# Altium PCB Solar Panel.PcbDoc
Units mm, origin at the board's own origin, x right, y up, seen from the top; angles counter-clockwise.
Board outline 284.5 x 311.5 mm, 2 copper layers (Top Layer, Bottom Layer); 9 components, 6 nets, 24 pads, 0 vias.
Unrouted connection lines stored in the file: 10.
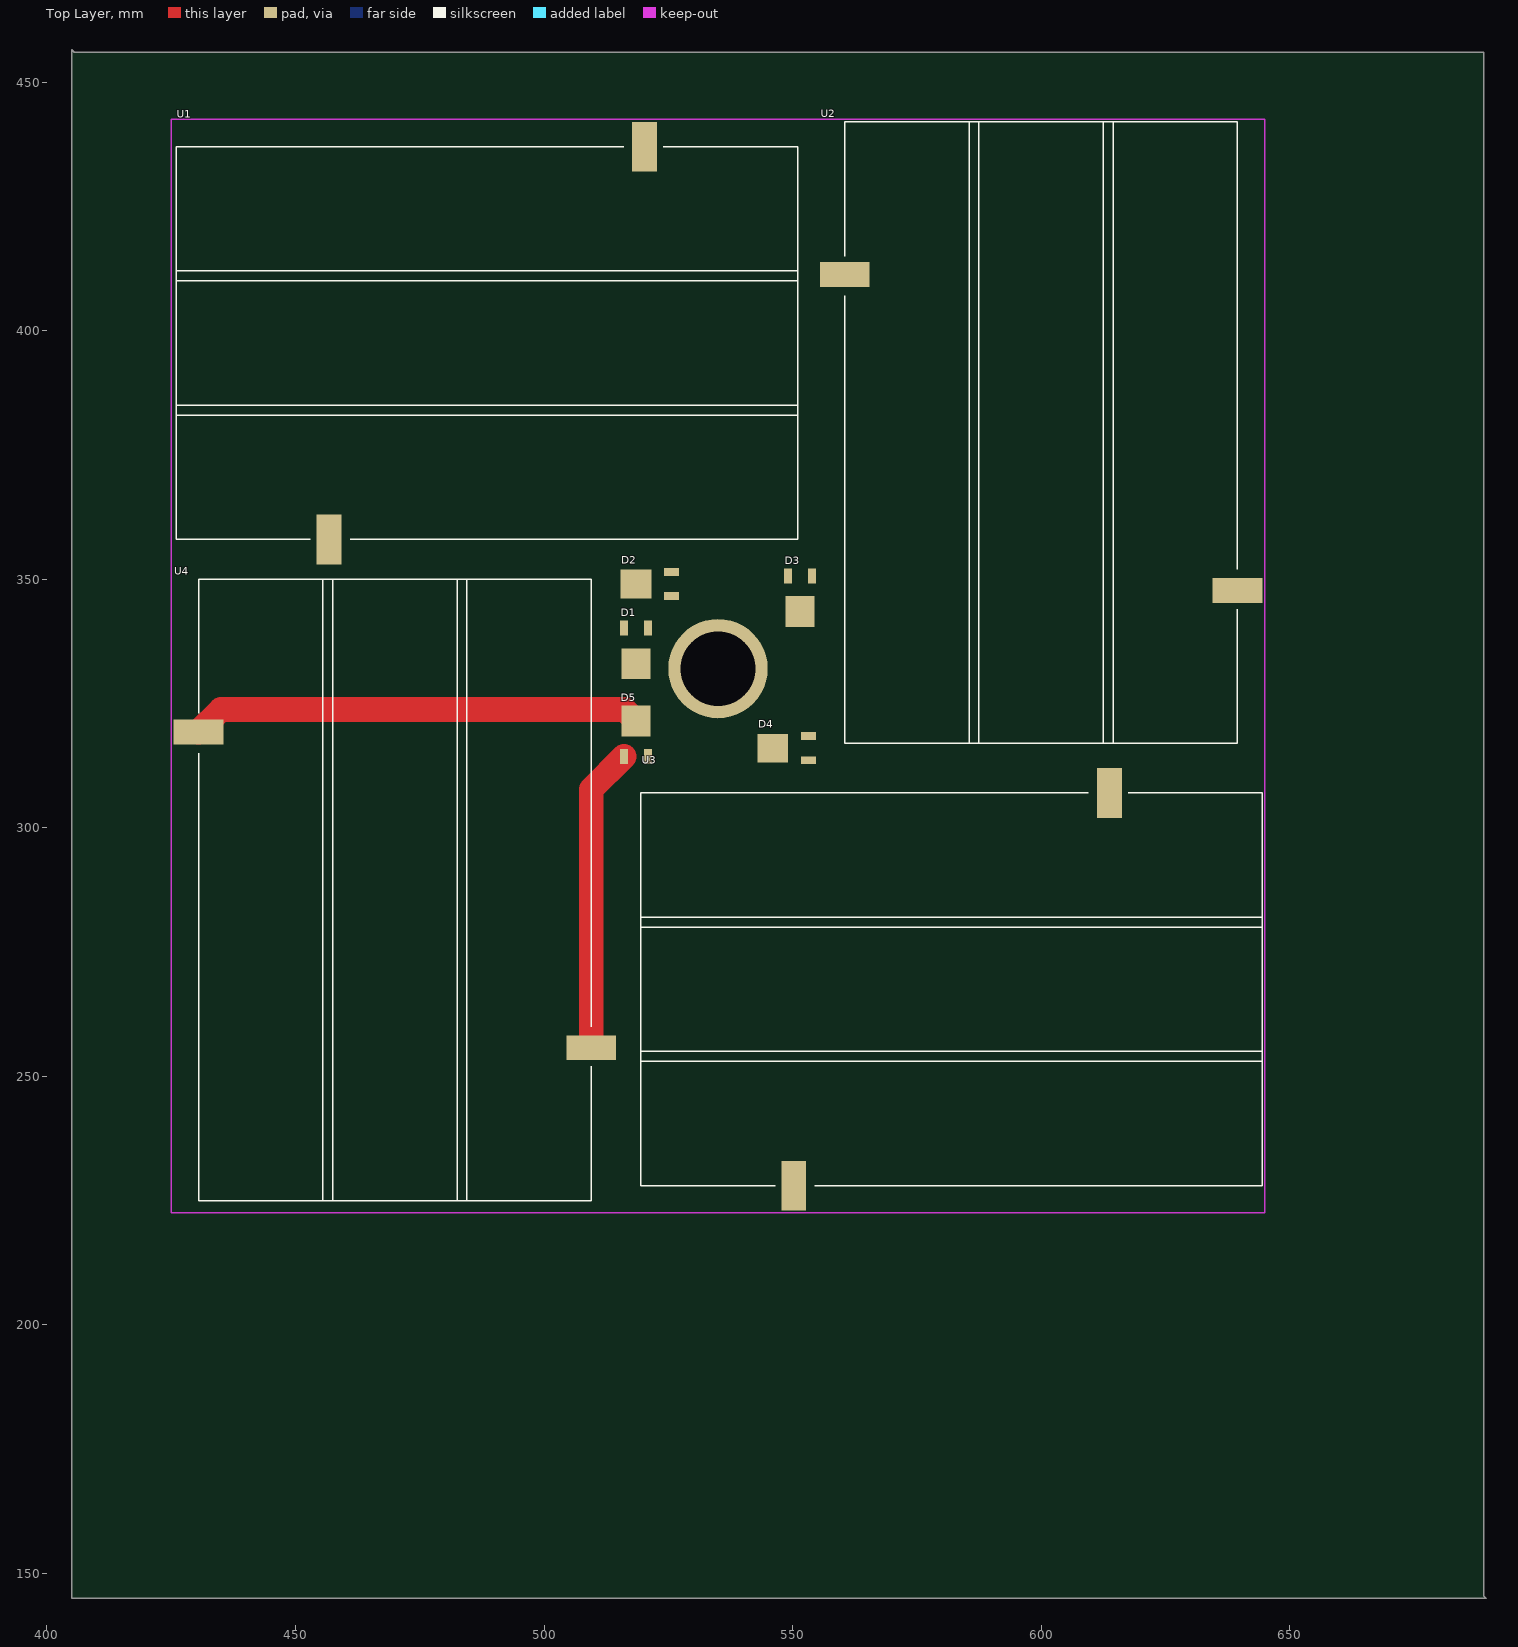
[diagram p0: Top Layer view]
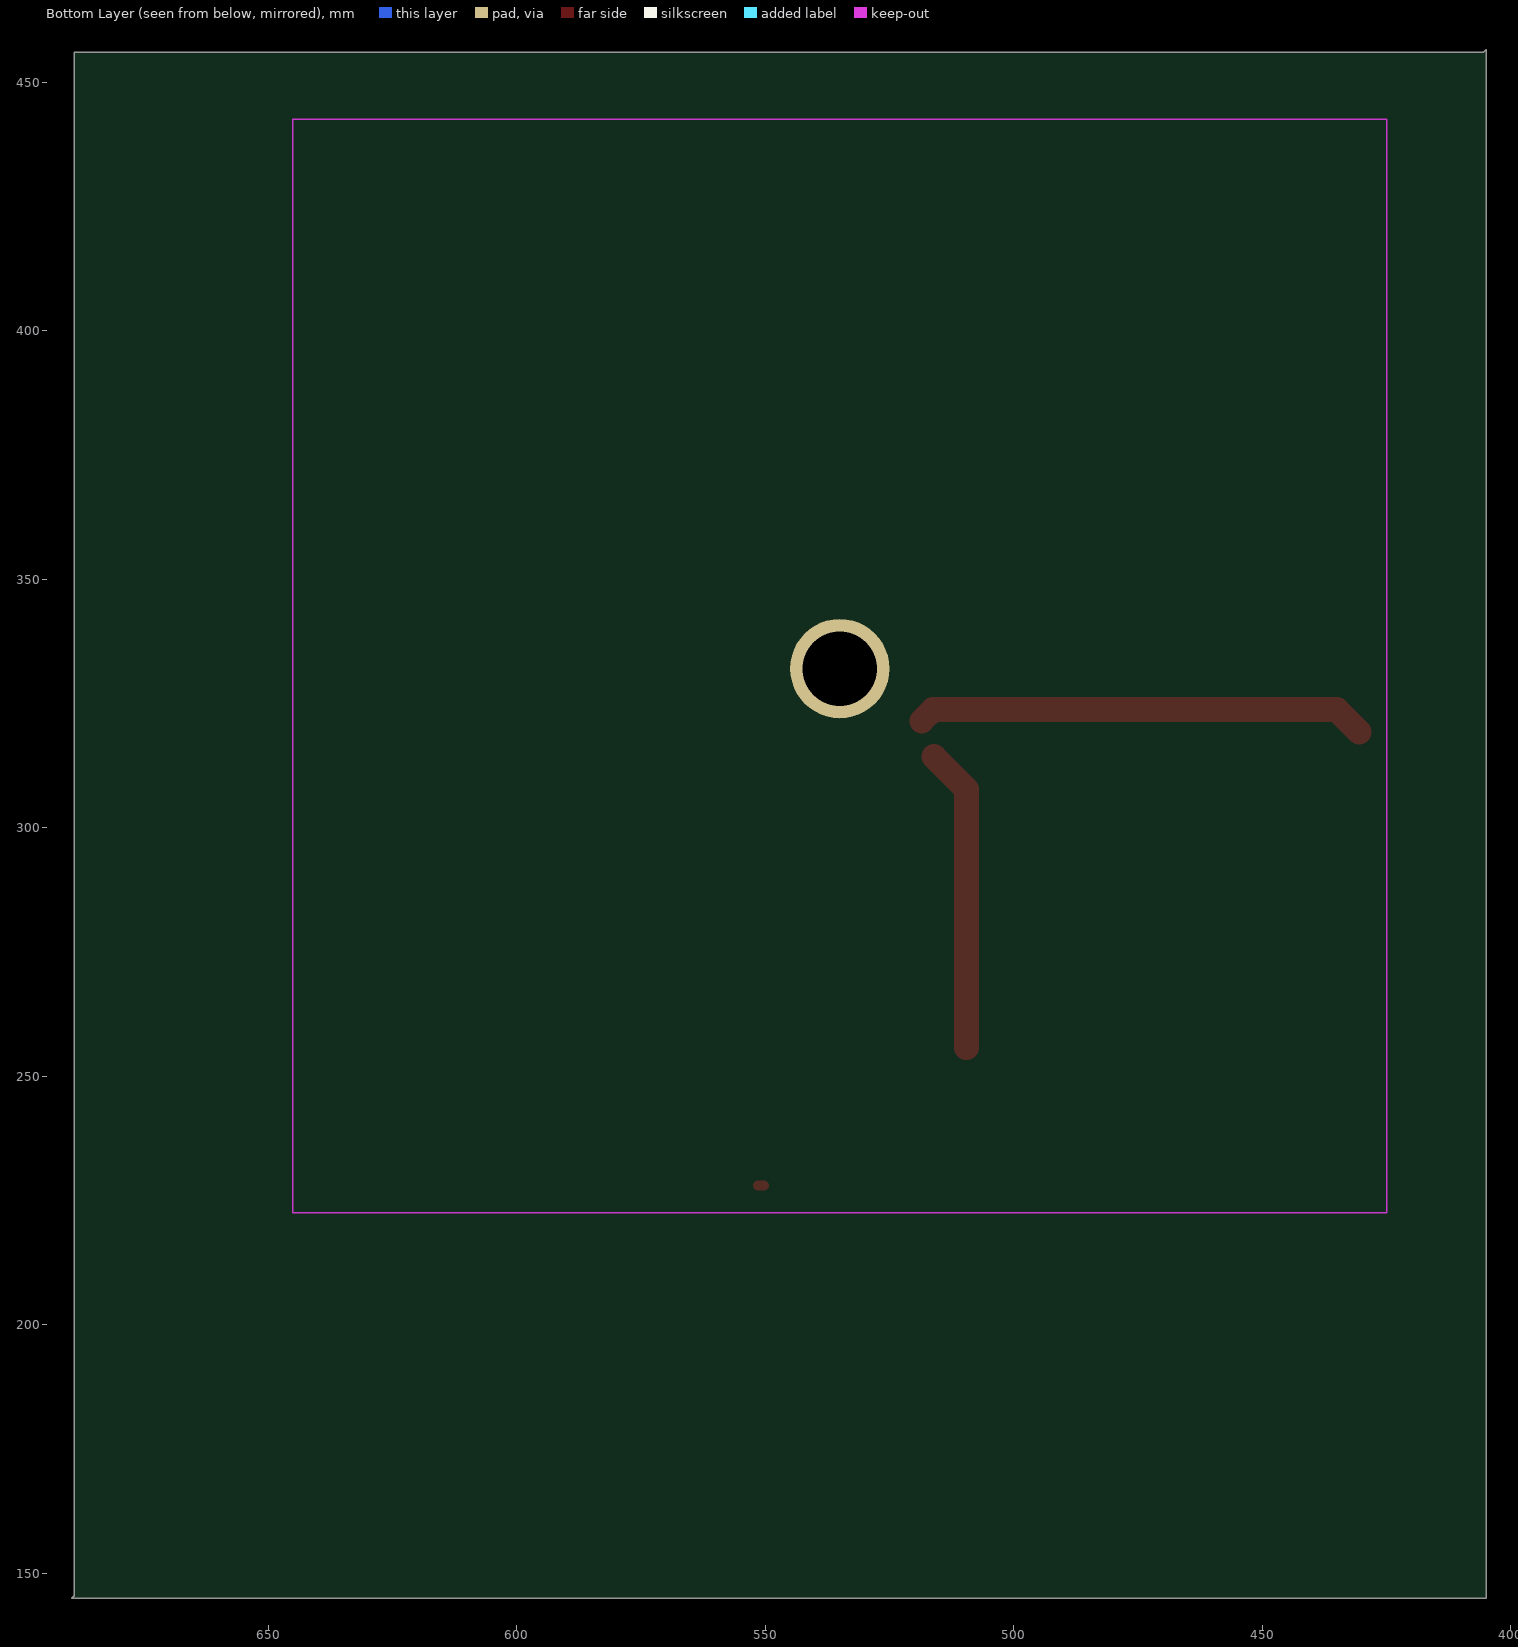
[diagram p1: Bottom Layer view, seen from below]

## Layer stack, top to bottom
Top Layer: signal copper 0.0356
Dielectric: dielectric 0.32, FR-4, Dk 4.8
Bottom Layer: signal copper 0.0356

## Board outline
407.5,456 689,456 689,145.5 689.5,145 405,145 405,456.5 405.5,456 670.5,456

## Design rules (kind name [scope] priority, off if disabled: settings)
Clearance [All] p1: gap=0.254
PolygonConnect [All] p1: connectstyle=Relief reliefconductorwidth=0.254 reliefentries=4 polygonreliefangle="90 Angle"
RoutingVias [All] p1: holewidth=0.711 width=1.27 viastyle="Through Hole" minholewidth=0.711 minwidth=1.27 maxholewidth=0.711 maxwidth=1.27
SilkscreenOverComponentPads [All] p1: minsilkscreentomaskgap=0.254
SolderMaskExpansion [All] p1: expansion=0.102
Width [All] p1: maxlimit=500 minlimit=2 preferedwidth=5
27 further rules are at their usual default settings.

## Components (designator, comment, footprint, x,y, rotation, side; value= is the part's Value field where it differs from the comment)
D1 "D Schottky" "DIODE, SCHOTTKY, DPAK" 518.5,333 r90 top
D2 "D Schottky" "DIODE, SCHOTTKY, DPAK" 518.5,349 r0 top
D3 "D Schottky" "DIODE, SCHOTTKY, DPAK" 551.5,343.5 r90 top
D4 "D Schottky" "DIODE, SCHOTTKY, DPAK" 546,316 r0 top
D5 "D Schottky" "DIODE, SCHOTTKY, DPAK" 518.5,321.5 r270 top
U1 "Solar cell strip" SOLARCELLSTRIP 426,358 r0 top
U2 "Solar cell strip" SOLARCELLSTRIP 560.5,442 r270 top
U3 "Solar cell strip" SOLARCELLSTRIP 519.5,228 r0 top
U4 "Solar cell strip" SOLARCELLSTRIP 509.5,225 r90 top

## Footprints (in the part's own frame and the unit in brackets; to place one, negate y for a bottom-side part, rotate by r counter-clockwise, add the part's x,y. Pads: shape width x height; smd on the part's side, far side on the other; paste and mask are expansions set on the pad)
"DIODE, SCHOTTKY, DPAK" [mm]
  rect 3x1.6 smd: 1(7.18,-2.428) 3(7.18,2.428)
  rect 6.2x5.8 smd: 4(0,0)
SOLARCELLSTRIP [mm] "Solar cell footprint"
  rect 5x10 smd: 1(30.734,0) 2(94.25,79)
  silkscreen extent 0,0 125,79

## Part data
D1 D2 D3 D4 D5: "Schottky Diode"

## Free pads (board coordinates)
  round 20 hole 15: 0(535,332)

## Nets (pads, with @x,y where several pads share a name; then routed paths per layer and width w, separated by ;. In a path a pad name is that pad's centre, name@x,y a point inside that pad or via, vN(x,y) a via of type N, cw(c..) or ccw(c..) an arc to the next point about the centre after c; other vN are vias at no path point)
NetD1_1: D1.1 D2.1 U1.1
NetD2_4: D2.4 D3.1 U1.2 U2.1
NetD4_4: D4.4 D5.1 U3.2 U4.1 | length 61.3
  Top Layer w5: U4.1 509.5,307.748 D5.1
UPPERCELL: D3.4 D4.1 U2.2 U3.1 | length 1.3
  Top Layer w2: U3.1 U3.1@551.5,228
V+: D1.4
V-: D5.4 U4.2 | length 90.8
  Top Layer w5: U4.2 435,323.75 516.25,323.75 D5.4
pads on no net: D1.3 D2.3 D3.3 D4.3 D5.3

## Keep-outs
Keep-Out Layer:
  lines w0.254: 425,222.5 645,222.5 645,442.5 425,442.5 425,222.5